# Altium PCB GridEye_STM32.PcbDoc
Units mm, origin at the board's own origin, x right, y up, seen from the top; angles counter-clockwise.
Board outline 95 x 62 mm, 2 copper layers (Top Layer, Bottom Layer); 64 components, 75 nets, 362 pads, 112 vias.
Unrouted connection lines stored in the file: 29.
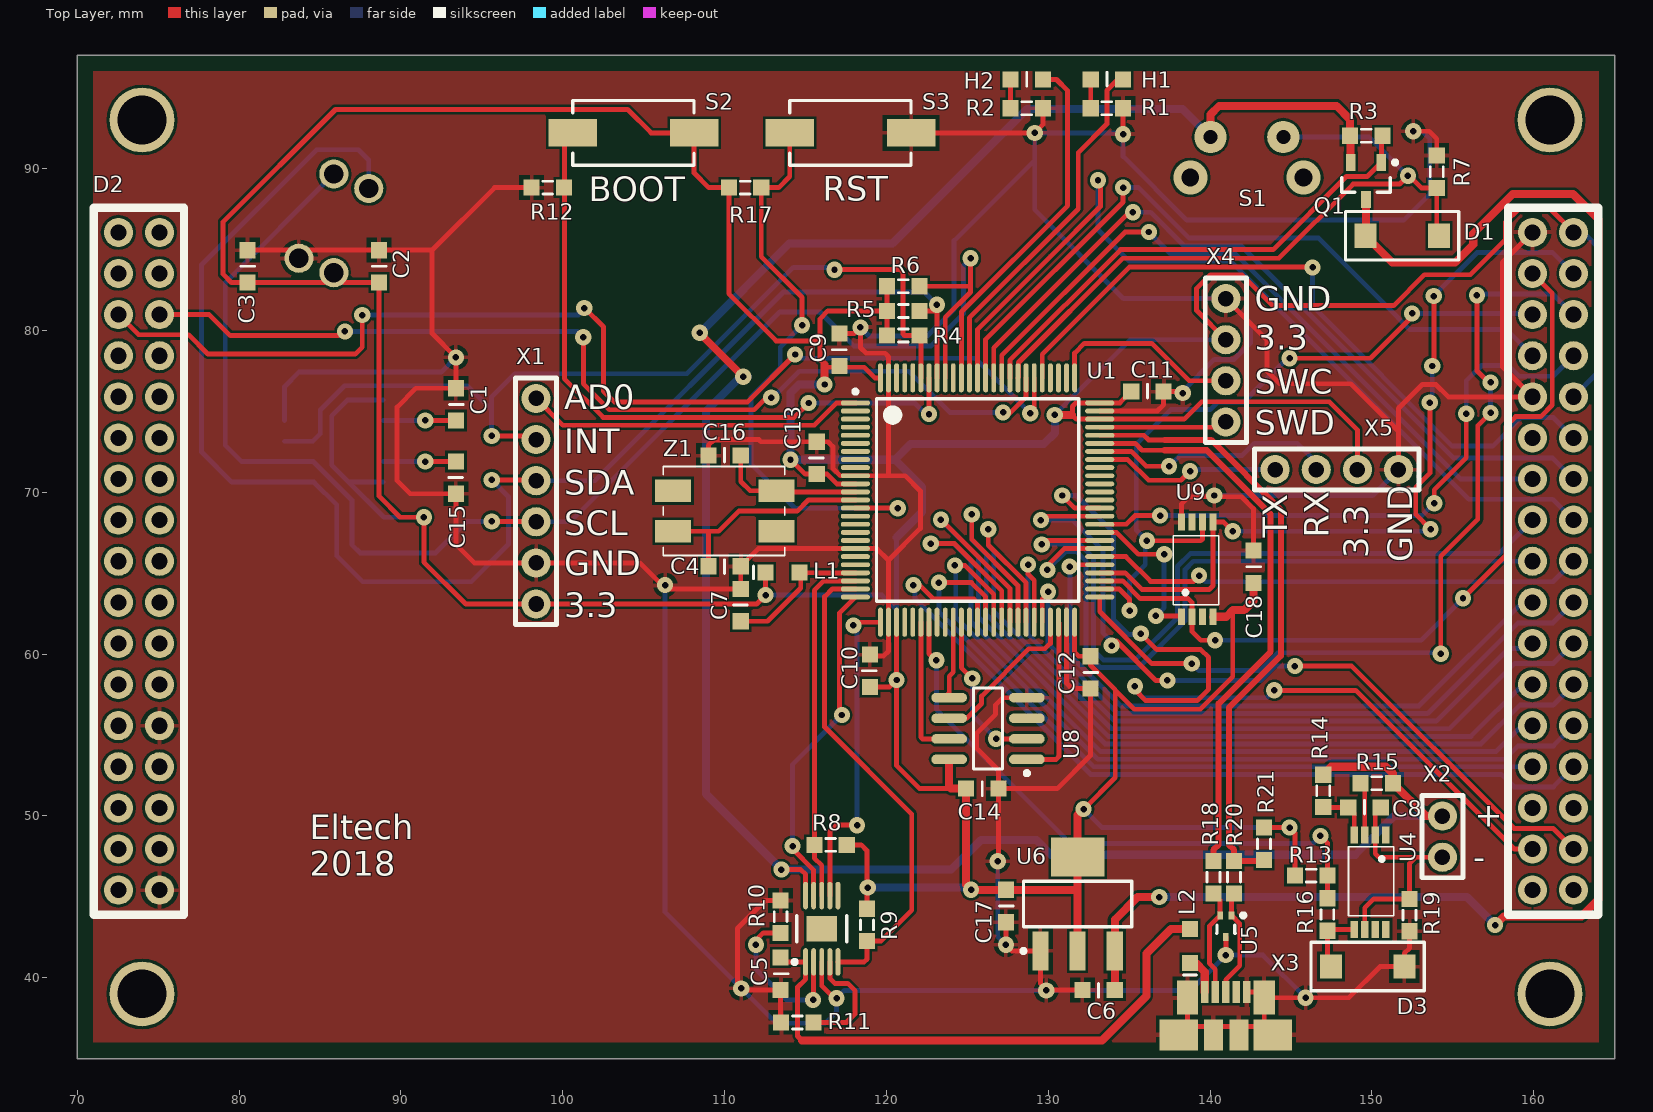
[diagram p0: Top Layer view]
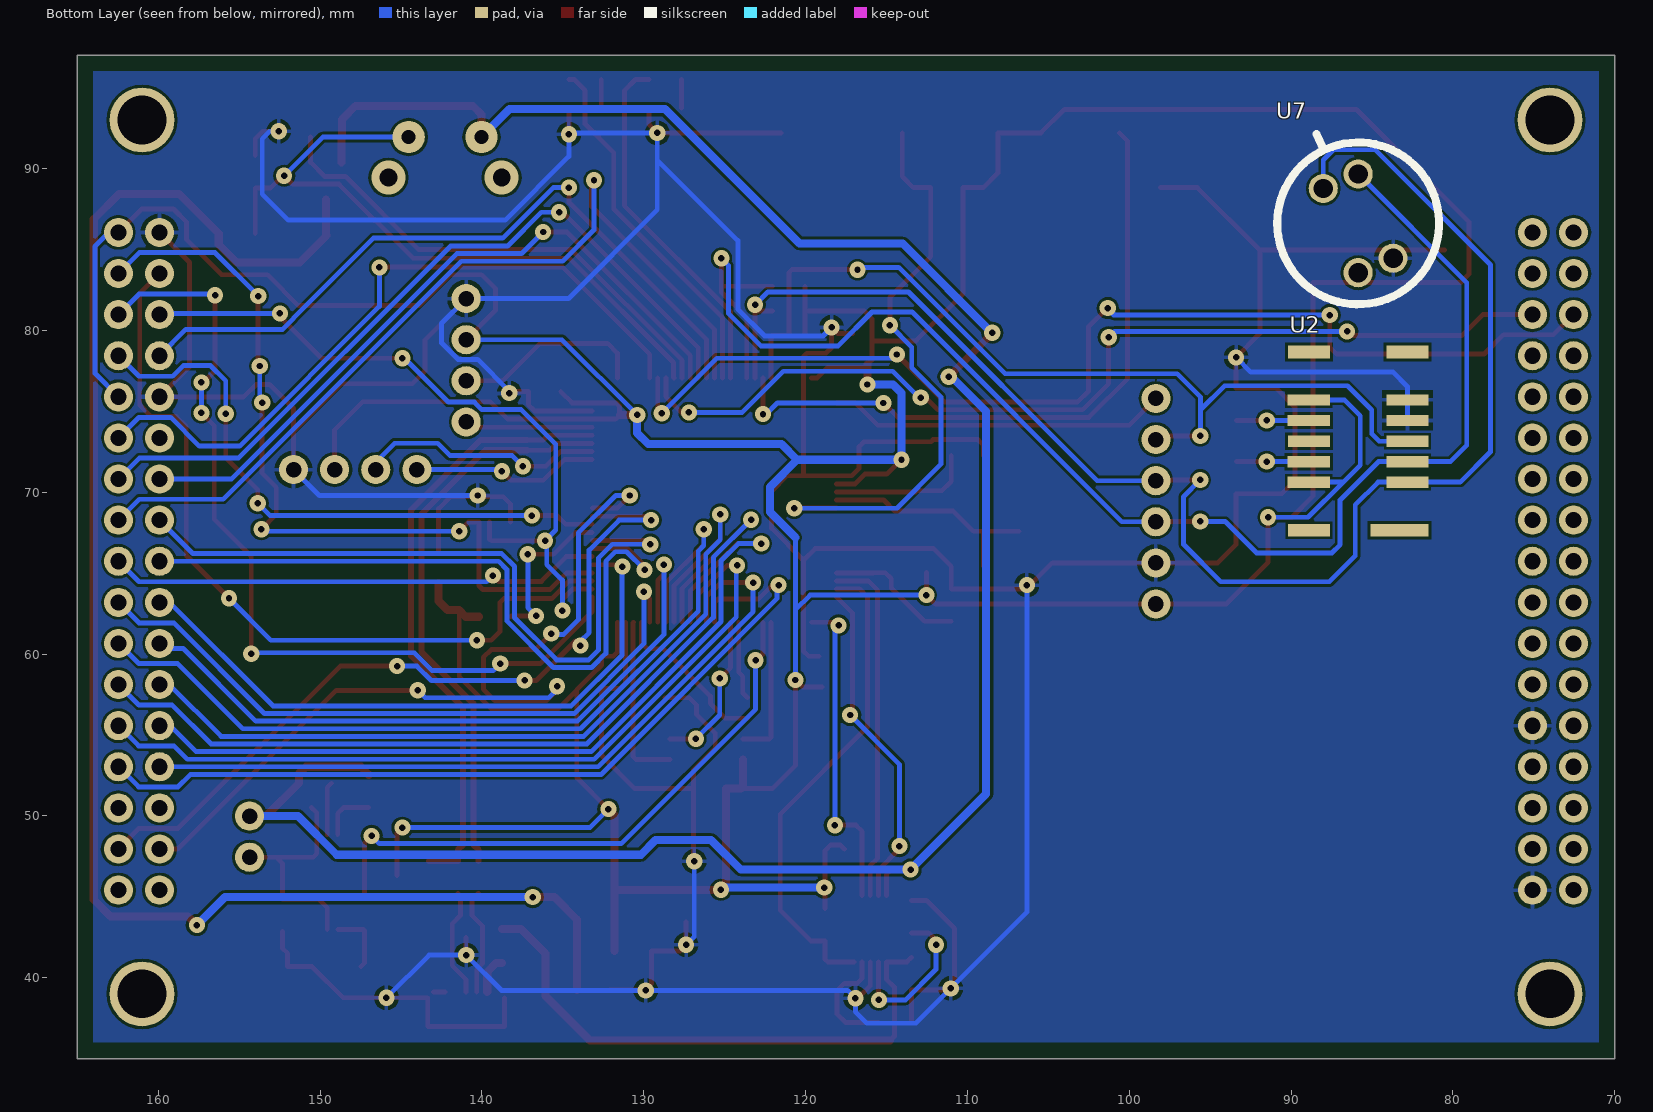
[diagram p1: Bottom Layer view, seen from below]
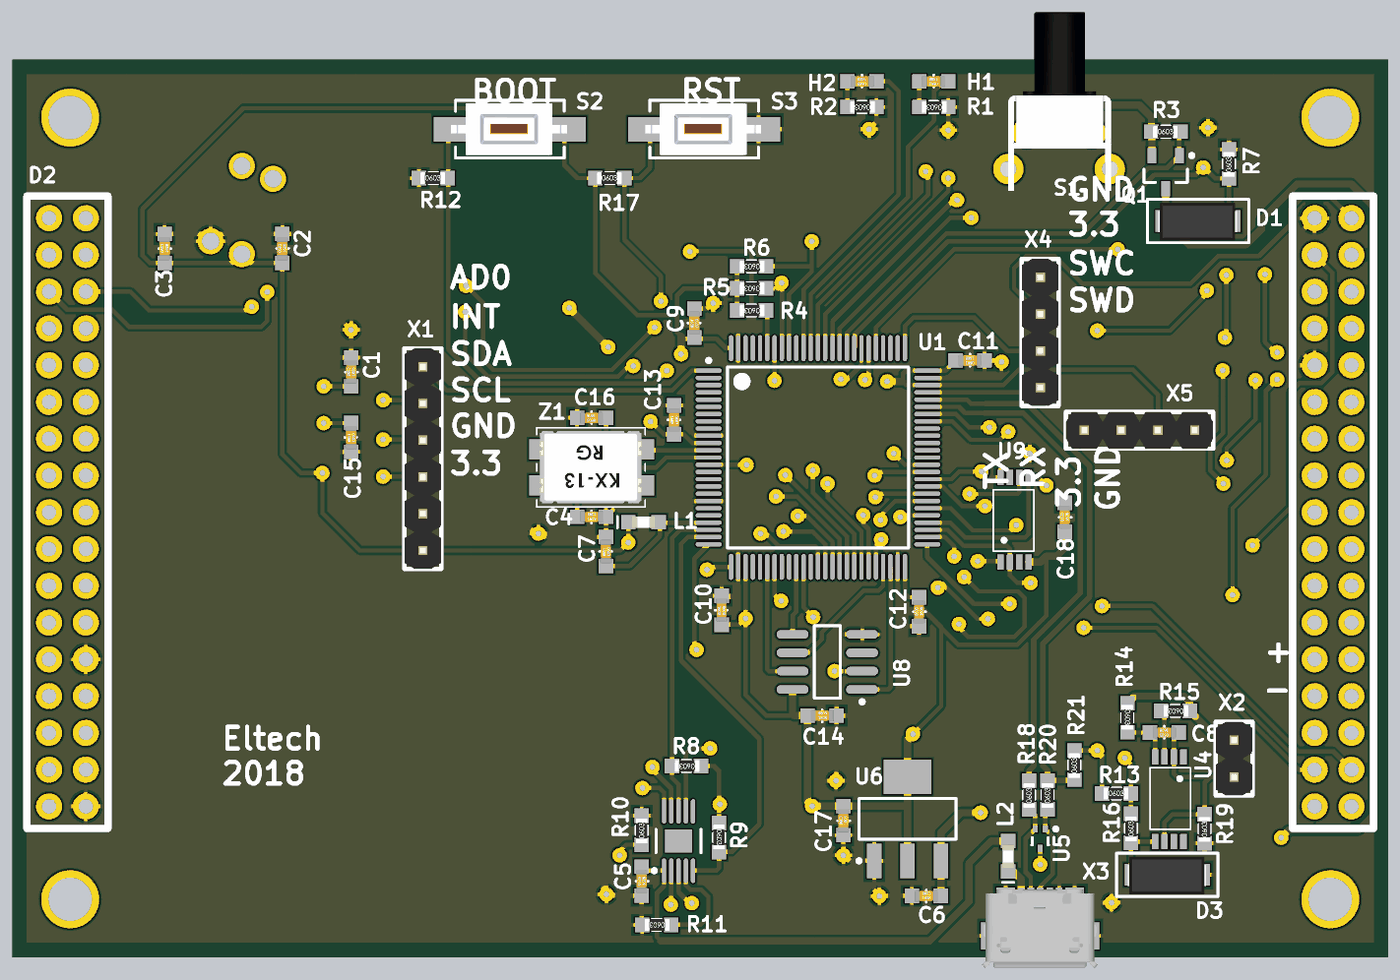
[diagram p2: 3D render of the assembled board from above, using the file's embedded part models]

## Layer stack, top to bottom
Top Solder: solder mask 0.0102, Solder Resist, Dk 3.5
Top Layer: signal copper 0.0356
Dielectric 1: dielectric 0.32, FR-4, Dk 4.8
Bottom Layer: signal copper 0.0356
Bottom Solder: solder mask 0.0102, Solder Resist, Dk 3.5

## Board outline
70,35 70,97 165,97 165,35

## Design rules (kind name [scope] priority, off if disabled: settings)
Clearance Clearance_1 [All] p1: gap=0.17
Clearance Poly [All vs InPoly] p2: gap=0.4
ComponentClearance [All] p1 off: gap=0.254 collisioncheckmode=3 verticalgap=0.254 showdistances=FALSE
DiffPairsRouting [All] p1: maxlimit=0.254 minlimit=0.254 mostfreqgap=0.254 toplayer_minwidth=0.3 toplayer_maxwidth=0.381 toplayer_prefwidth=0.381 bottomlayer_minwidth=0.3 bottomlayer_maxwidth=0.381 bottomlayer_prefwidth=0.381 maxuncoupledlength=12.7
HoleSize [IsVia] p1: absolutevalues=TRUE maxlimit=2.54 minlimit=0.4 maxpercent=80.000 minpercent=20.000
PolygonConnect [All] p1: connectstyle=Relief reliefconductorwidth=0.254 reliefentries=4 polygonreliefangle="90 Angle" airgapwidth=0.254
RoutingVias [All] p1: holewidth=0.711 width=1.27 viastyle="Through Hole" minholewidth=0.711 minwidth=1.27 maxholewidth=0.711 maxwidth=1.27
SolderMaskExpansion [All] p1: expansion=0.102
Width [All] p1: maxlimit=1 minlimit=0.3 preferedwidth=0.3
27 further rules are at their usual default settings.

## Classes and differential pairs
differential pair USB: +USB_P -USB_N

## Components (designator, comment, footprint, x,y, rotation, side; value= is the part's Value field where it differs from the comment)
C1 "1uF" C0603 93.396,74.524 r90 top
C2 "100uF" C0603 88.646,83.058 r90 top
C3 "1uF" C0603 80.518,83.058 r90 top
C4 "22pF" C0603 109.098,65.43 r0 top
C5 "1uF" C0603 113.462,39.35 r90 top
C6 "100uF" C0603 132.207,39.243 r0 top
C7 "100nF" C0603 110.998,63.927 r270 top
C8 "100nF" C0603 150.439,50.521 r180 top
C9 "100nF" C0603 117.094,79.705 r270 top
C10 "100nF" C0603 118.974,59.869 r270 top
C11 "100nF" C0603 137.028,76.22 r180 top
C12 "100nF" C0603 132.608,57.968 r90 top
C13 "100nF" C0603 115.697,73.02 r270 top
C14 "100nF" C0603 125.017,51.689 r0 top
C15 "1.5uF" C0603 93.396,71.807 r270 top
C16 "22pF" C0603 110.898,72.263 r180 top
C17 "100uF" C0603 127.381,43.534 r90 top
C18 "100nF" C0603 142.672,64.491 r90 top
D1 "5.6 Shottky" SMA_Diode 151.867,85.852 r180 top
D2 "Display 3.2inch" Display_3.2inch 162.458,45.415 r180 top
D3 "5.6 Shottky" SMA_Diode 149.737,40.691 r180 top
H1 "LED_SMD" C0603 134.52,95.504 r180 top
H2 "LED_SMD" C0603 129.567,95.504 r180 top
L1 "BLM21PG220" L0603 112.679,65.049 r0 top
L2 "BLM21PG220" L0603 138.76,41.069 r90 top
Q1 "IRLML9303" INF-PG-SOT23_N 149.631,89.23 r270 top
R1 "150" R0603 134.52,93.726 r180 top
R2 "150" R0603 129.567,93.726 r180 top
R3 "10K" R0603 148.747,92.024 r0 top
R4 "10K" R0603 121.94,79.68 r180 top
R5 "10K" R0603 121.94,81.204 r180 top
R6 "10K" R0603 121.94,82.728 r180 top
R7 "1K" R0603 154,88.905 r90 top
R8 "10K" R0603 117.45,48.209 r180 top
R9 "10K" R0603 118.796,44.166 r270 top
R10 "?" R0603 113.462,42.874 r90 top
R11 "?" R0603 115.392,37.236 r180 top
R12 "10K" R0603 98.171,88.824 r0 top
R13 "10k" R0603 145.344,46.309 r0 top
R14 "500" R0603 146.99,52.446 r270 top
R15 "1k" R0603 151.201,52.019 r180 top
R16 "150" R0603 147.244,43.007 r90 top
R17 "10K" R0603 110.363,88.824 r0 top
R18 "28" R0603 140.208,45.312 r90 top
R19 "?" R0603 152.324,42.975 r90 top
R20 "28" R0603 141.478,45.312 r90 top
R21 "1.5k" R0603 143.332,47.376 r90 top
S1 "Tact_switch" Tact_switch_DIP_angle_ 144.526,91.948 r180 top
S2 "1437566-3" Tact_switch_smd 108.109,92.202 r180 top
S3 "1437566-3" Tact_switch_smd 121.521,92.202 r180 top
U1 "STM32L475VG" LQFP100_N 125.628,69.52 r0 top
U2 "GridEye" "Panasonic GridEye" 88.6,67.652 r90 bottom
U4 "DS2780 Fuel Gauge" TSSOP-8 150.854,48.833 r180 top
U5 "TPD2USB30" SOT_TPD2USB30 140.97,43.18 r270 top
U6 "LD1117AS12TR" SOT-223_N 131.812,44.556 r90 top
U7 "MLX90640 IR Array" MLX90640 85.852,86.614 r90 bottom
U8 "23K256-I/SN" SOIC-SN8_N 126.276,55.397 r180 top
U9 "M95320 flash" TSSOP-8 138.227,62.306 r0 top
X1 "Pins 6x2.54" "Pins 6x2.54" 98.349,75.794 r270 top
X2 "Pins 2x2.54" "Pins 2x2.54" 154.356,47.447 r90 top
X3 "microUSB" microUSB 142.295,39.116 r90 top
X4 "Pins 4x2.54" "Pins 4x2.54" 140.97,74.346 r90 top
X5 "Pins 4x2.54" "Pins 4x2.54" 144.018,71.399 r0 top
Z1 "KX-13" "kx 13 12MHz" 113.207,67.589 r180 top

## Footprints (in the part's own frame and the unit in brackets; to place one, negate y for a bottom-side part, rotate by r counter-clockwise, add the part's x,y. Pads: shape width x height; smd on the part's side, far side on the other; paste and mask are expansions set on the pad)
C0603 [mm]
  rect 1x1 smd: 1(-0.1,0) 2(1.9,0)
  silkscreen extent 0.9,-0.45 0.9,0.4, body extent 0.1,-0.4 1.7,0.4, height 0.8
Display_3.2inch [mm]
  round 1.8 hole 1: 1(0,0) 1(89.916,-40.64) 2(2.54,0) 2(87.376,-40.64) 3(0,-2.54) 3(89.916,-38.1) 4(2.54,-2.54) 4(87.376,-38.1) 5(0,-5.08) 5(89.916,-35.56) 6(2.54,-5.08) 6(87.376,-35.56) 7(0,-7.62) 7(89.916,-33.02) 8(2.54,-7.62) 8(87.376,-33.02) 9(0,-10.16) 9(89.916,-30.48) 10(2.54,-10.16) 10(87.376,-30.48) 11(0,-12.7) 11(89.916,-27.94) 12(2.54,-12.7) 12(87.376,-27.94) 13(0,-15.24) 13(89.916,-25.4) 14(2.54,-15.24) 14(87.376,-25.4) 15(0,-17.78) 15(89.916,-22.86) 16(2.54,-17.78) 16(87.376,-22.86) 17(0,-20.32) 17(89.916,-20.32) 18(2.54,-20.32) 18(87.376,-20.32) 19(0,-22.86) 19(89.916,-17.78) 20(2.54,-22.86) 20(87.376,-17.78) 21(0,-25.4) 21(89.916,-15.24) 22(2.54,-25.4) 22(87.376,-15.24) 23(0,-27.94) 23(89.916,-12.7) 24(2.54,-27.94) 24(87.376,-12.7) 25(0,-30.48) 25(89.916,-10.16) 26(2.54,-30.48) 26(87.376,-10.16) 27(0,-33.02) 27(89.916,-7.62) 28(2.54,-33.02) 28(87.376,-7.62) 29(0,-35.56) 29(89.916,-5.08) 30(2.54,-35.56) 30(87.376,-5.08) 31(0,-38.1) 31(89.916,-2.54) 32(2.54,-38.1) 32(87.376,-2.54) 33(0,-40.64) 33(89.916,0) 34(2.54,-40.64) 34(87.376,0)
  silkscreen extent -1.52,-42.16 91.44,1.52
INF-PG-SOT23_N [mm] "SOT23, 3-Leads, Body 2.9x1.3mm, Pitch 0.95mm, IPC Medium Density"
  rect 1.05x0.6 smd: 1(-1.15,0.95) 2(-1.15,-0.95) 3(1.15,0)
  silkscreen extent -1.27,-1.5 0.7,1.93, body extent -0.7,-1.5 0.7,1.5, height 1.1
"kx 13 12MHz" [mm]
  rect 2.2x1.4 smd: 1(0,-2.5) 2(6.4,-2.5) 3(6.4,0) 4(0,0)
  silkscreen extent -0.5,-4 7,1.5, body extent -0.22,-3.77 6.78,1.23, height 1.3
L0603 [mm]
  rect 1x1 smd: 1(-0.149,0) 2(1.951,0)
  silkscreen extent -0.9,-0.4 -0.9,0.4, body extent 0.09,-0.4 1.69,0.4, height 0.8
LQFP100_N [mm] "Thin QFP, 100-Leads, Body 14x14mm, Pitch 0.5mm, IPC Medium Density"
  oval 1.8x0.3 smd: 1(-7.55,6) 2(-7.55,5.5) 3(-7.55,5) 4(-7.55,4.5) 5(-7.55,4) 6(-7.55,3.5) 7(-7.55,3) 8(-7.55,2.5) 9(-7.55,2) 10(-7.55,1.5) 11(-7.55,1) 12(-7.55,0.5) 13(-7.55,0) 14(-7.55,-0.5) 15(-7.55,-1) 16(-7.55,-1.5) 17(-7.55,-2) 18(-7.55,-2.5) 19(-7.55,-3) 20(-7.55,-3.5) 21(-7.55,-4) 22(-7.55,-4.5) 23(-7.55,-5) 24(-7.55,-5.5) 25(-7.55,-6) 51(7.55,-6) 52(7.55,-5.5) 53(7.55,-5) 54(7.55,-4.5) 55(7.55,-4) 56(7.55,-3.5) 57(7.55,-3) 58(7.55,-2.5) 59(7.55,-2) 60(7.55,-1.5) 61(7.55,-1) 62(7.55,-0.5) 63(7.55,0) 64(7.55,0.5) 65(7.55,1) 66(7.55,1.5) 67(7.55,2) 68(7.55,2.5) 69(7.55,3) 70(7.55,3.5) 71(7.55,4) 72(7.55,4.5) 73(7.55,5) 74(7.55,5.5) 75(7.55,6)
  oval 0.3x1.8 smd: 26(-6,-7.55) 27(-5.5,-7.55) 28(-5,-7.55) 29(-4.5,-7.55) 30(-4,-7.55) 31(-3.5,-7.55) 32(-3,-7.55) 33(-2.5,-7.55) 34(-2,-7.55) 35(-1.5,-7.55) 36(-1,-7.55) 37(-0.5,-7.55) 38(0,-7.55) 39(0.5,-7.55) 40(1,-7.55) 41(1.5,-7.55) 42(2,-7.55) 43(2.5,-7.55) 44(3,-7.55) 45(3.5,-7.55) 46(4,-7.55) 47(4.5,-7.55) 48(5,-7.55) 49(5.5,-7.55) 50(6,-7.55) 76(6,7.55) 77(5.5,7.55) 78(5,7.55) 79(4.5,7.55) 80(4,7.55) 81(3.5,7.55) 82(3,7.55) 83(2.5,7.55) 84(2,7.55) 85(1.5,7.55) 86(1,7.55) 87(0.5,7.55) 88(0,7.55) 89(-0.5,7.55) 90(-1,7.55) 91(-1.5,7.55) 92(-2,7.55) 93(-2.5,7.55) 94(-3,7.55) 95(-3.5,7.55) 96(-4,7.55) 97(-4.5,7.55) 98(-5,7.55) 99(-5.5,7.55) 100(-6,7.55)
  silkscreen extent -7.67,-6.25 6.25,6.82, body extent -7,-7 7,7, height 1.6
microUSB [mm]
  rect 1.38x0.45 smd: 1(0,2.625) 2(0,1.975) 3(0,1.325) 4(0,0.675) 5(0,0.025)
  rect 1.9x2.37 smd: 5(-2.65,4.225) 5(-2.65,-1.575)
  rect 1.9x1.175 smd: 5(-2.65,0.525) 5(-2.65,2.1)
  rect 2.1x1.3 smd: 5(-0.35,3.7) 5(-0.35,-1.05)
  body extent -4.85,-2.64 0.58,5.34, height 2.87
MLX90640 [mm]
  round 1.8 hole 1.2: 1(-3.048,0) 2(-2.155,-2.155) 3(3.048,0) 4(2.155,2.155)
  silkscreen extent -5,-5 5.52,5
"Panasonic GridEye" [mm]
  rect 0.8x3.6 smd: 1(0,-5.3)
  rect 0.7x2.6 smd: 2(2.972,-5.795) 3(4.242,-5.795) 4(5.5,-5.8) 5(6.782,-5.795) 6(8.052,-5.795) 9(8.052,0.305) 10(6.782,0.305) 11(5.5,0.3) 12(4.242,0.305) 13(2.972,0.305)
  rect 0.8x2.6 smd: 7(11,-5.8) 8(11,0.3) 14(0,0.3)
  body extent -0.26,-6.81 11.34,1.19, height 4.34
"Pins 2x2.54" [mm]
  round 1.8 hole 0.96: 1(0,0) 2(2.54,0)
  silkscreen extent -1.27,-1.27 3.81,1.27, body extent -1.27,-1.27 3.81,1.27, height 8.81
"Pins 4x2.54" [mm]
  round 1.8 hole 0.96: 1(0,0) 2(2.54,0) 3(5.08,0) 4(7.62,0)
  silkscreen extent -1.27,-1.27 8.89,1.27, body extent -1.27,-1.27 8.89,1.27, height 8.81
"Pins 6x2.54" [mm]
  round 1.8 hole 0.96: 1(0,0) 2(2.54,0) 3(5.08,0) 4(7.62,0) 5(10.16,0) 6(12.7,0)
  silkscreen extent -1.27,-1.27 13.97,1.27, body extent -1.27,-1.27 13.97,1.27, height 8.81
R0603 [mm]
  rect 1x1 smd: 1(-0.1,0) 2(1.9,0)
  silkscreen extent 0.6,-0.4 1.2,0.4, body extent 0.01,-0.4 1.71,0.4, height 0.56
SMA_Diode [mm]
  rect 1.35x1.5 smd: 1(-2.265,0) 2(2.265,0)
  silkscreen extent -3.5,-1.5 3.5,1.5, body extent -2.68,-1.25 2.73,1.35, height 2.31
SOIC-SN8_N [mm] "SOIC, 8-Leads, Body 4.9x3.8mm, Pitch 1.27mm, IPC Medium Density"
  oval 2.2x0.6 smd: 1(-2.4,1.905) 2(-2.4,0.635) 3(-2.4,-0.635) 4(-2.4,-1.905) 5(2.4,-1.905) 6(2.4,-0.635) 7(2.4,0.635) 8(2.4,1.905)
  silkscreen extent -2.53,-2.5 0.9,2.88, body extent -2,-2.5 2,2.5, height 1.75
SOT-223_N [mm] "SOT223, 4-Leads, Body 6.5x3.5mm, Pitch 2.3mm, Lead Span 7mm, IPC Medium Density"
  rect 2.4x1 smd: 1(-2.9,2.3) 2(-2.9,0) 3(-2.9,-2.3)
  rect 2.4x3.3 smd: 4(2.9,0)
  silkscreen extent -3.02,-3.35 1.4,3.47, body extent -1.85,-3.35 1.85,3.35, height 1.8
SOT_TPD2USB30 [mm] "SOT23, 3-Leads, Body 1,00x1,00mm, Pitch 0,35mm, IPC Medium Density"
  rect 0.5x0.35 smd: 1(-0.675,0.35) 2(-0.675,-0.35) 3(0.675,0)
  silkscreen extent -0.8,-0.58 0.43,1.2, body extent -0.43,-0.53 0.43,0.53, height 0.5
Tact_switch_DIP_angle_ [mm]
  round 2 hole 0.85: 1(0,0) 2(4.5,0)
  body extent -1.99,-8.33 6.41,4.03, height 7
Tact_switch_smd [mm]
  rect 3x1.7 smd: 1(0,0) 2(7.5,0)
  silkscreen extent 0,-2 7.5,2, body extent -0.19,-1.8 7.81,1.8, height 2.51
TSSOP-8 [mm]
  rect 0.45x1.05 smd: 1(0,0) 2(0.65,0) 3(1.3,0) 4(1.95,0) 5(1.95,5.85) 6(1.3,5.85) 7(0.65,5.85) 8(0,5.85)
  silkscreen extent -0.5,0.75 2.3,5

## Part data
C1 C2 C3 C4 C5 C6 C7 C8 C9 C10 C11 C12 C13 C14 C15 C16 C17 C18: library part Condensator
D1 D3: library part Diod
D2: library part Display_3.2inch
L1 L2: library part Inductance
Q1: library part "BSS215P H6327", "P-Channel OptiMOS P2 Small-Signal-Transistor, -20 V VDS, -1.5 A ID, -55 to 150 degC, PG-SOT23, Reel, Green"
R1 R2 R3 R4 R5 R6 R7 R8 R9 R10 R11 R12 R13 R14 R15 R16 R17 R18 R19 R20 R21: library part Resistor
S2 S3: library part Tact_switch
U1: "STM32 ARM-based 32-bit MCU with 1 Mbyte Flash, 100-pin LQFP"
U2: library part "Panasonic GridEye"
U4: library part DS2780+
U5: "Usb protector"
U6: "1A, Low Drop Positive Voltage Regulator, 1.2V, 4-Pin SOT-223, Tape and Reel"
U7: library part MLX90640
U8: "256K, 32768x8-bit, 3.6V SPI Serial SRAM, 8-Pin SOIC 3.9mm, Industrial Temperature"
U9: library part M95320
Z1: library part "KX 13 Geyer"

## Free pads (board coordinates)
  round 4 hole 3: 0(74,93) 1(161,93) 2(74,39) 3(161,39)
  oval 0.3x1.7 smd: 1(115.002,40.978) 2(115.502,40.978) 3(116.002,40.978) 4(116.502,40.978) 5(117.002,40.978) 6(117.002,45.078) 7(116.502,45.078) 8(116.002,45.078) 9(115.502,45.078) 10(115.002,45.078)
  rect 1.88x1.57 smd: 11(116.002,43.028)

## Via types
v1: diameter 1, hole 0.4, Top Layer to Bottom Layer, 110 vias
v2: diameter 2.1, hole 1.1, Top Layer to Bottom Layer, 2 vias

## Nets (pads, with @x,y where several pads share a name; then routed paths per layer and width w, separated by ;. In a path a pad name is that pad's centre, name@x,y a point inside that pad or via, vN(x,y) a via of type N, cw(c..) or ccw(c..) an arc to the next point about the centre after c; other vN are vias at no path point)
+3.3V: C2.1 C3.1 C9.2 C10.2 C11.2 C12.2 C13.2 C14.1 C17.2 C18.1 D2.25 D2.33 L1.1 R4.2 R5.2 R6.2 R8.1 R9.1 R13.1 R17.1 R21.2 S2.1 U1.11 U1.28 U1.50 U1.73 U1.75 U1.100 U2.9 U2.13 U6.2 U6.4 U7.1 U8.8 U9.4 X1.6 X4.3 X5.3 | length 373.5
  Top Layer w0.3: L1.1 v1(112.53,63.644) 111.98,63.094 X1.6 94.005,63.094 91.415,65.684 v1(91.415,68.453) 89.941,68.453 88.646,69.748 C2.1 86.46,82.958 U7.1 85.244,82.958 C3.1 79.526,82.958 78.994,83.49 78.994,86.69 85.954,93.65 104.013,93.65 105.461,92.202 S2.1 108.109,89.731 109.017,88.824 R17.1 110.263,82.269 113.182,79.35 115.9,79.35 ; v1(114.071,72.009) 114.097,72.009 114.986,71.12 C13.2 116.332,71.12 116.932,70.52 U1.11 ; R8.1@117.595,47.955 117.849,48.209 118.44,48.209 118.796,47.854 R9.1 ; C10.2 120.199,57.969 v1(120.628,58.398) ; U1.100 119.272,77.07 118.618,77.724 116.357,77.724 116.18,77.902 115.9,78.181 115.9,79.35 ; R4.2 R5.2 ; R6.2 R5.2 ; U1.28 v1(120.628,58.398) ; 123.977,51.689 122.047,51.689 120.628,53.108 v1(120.628,58.398) ; U1.50 131.628,60.116 131.877,59.868 C12.2 132.608,59.314 133.235,58.688 133.241,58.688 134.137,57.791 134.137,57.768 ; v1(132.182,50.419) 134.137,52.375 134.137,57.768 ; C11.2 134.427,75.52 U1.75 131.705,75.52 131.496,75.311 131.496,74.752 131.728,74.52 U1.73 138.401,74.52 139.471,75.59 147.371,75.59 149.098,73.863 X5.3 ; X4.3 139.167,81.229 139.167,82.601 140.005,83.439 141.961,83.439 143.866,81.534 151.333,81.534 153.238,83.439 156.083,83.439 158.242,85.598 158.242,86.69 159.055,87.503 161.011,87.503 D2.33@162.458,86.055 ; 141.402,62.713 141.402,58.598 139.395,56.591 135.315,56.591 134.137,57.768 ; R21.2 v1(144.907,49.276) 145.244,48.939 R13.1 ; 115.9,79.35 115.9,80.721 116.383,81.204 R5.2
  Top Layer w0.5: v1(116.18,76.657) 116.18,77.902 ; U8.8 123.876,51.791 123.977,51.689 C14.1 124.917,45.745 v1(125.229,45.434) C17.2 131.615,45.434 ; v1(130.404,74.778) 131.47,74.778 ; U6.2 U6.4 131.812,50.049 v1(132.182,50.419) ; U9.4 140.995,62.306 141.402,62.713 142.113,62.713 142.672,63.271 C18.1@142.672,64.364
  Bottom Layer w0.3: U2.13 86.78,70.624 ; U2.9 86.702,75.704 85.725,74.727 85.725,71.679 86.78,70.624 ; v1(91.415,68.453) 88.951,68.453 86.78,70.624 ; v1(112.53,63.644) 119.718,63.644 120.628,62.734 ; v1(120.628,58.398) 120.628,62.734 ; 120.628,67.212 120.628,62.734 ; v1(130.404,74.778) 135.052,79.426 X4.3 ; v1(132.182,50.419) 133.325,49.276 v1(144.907,49.276) ; D2.25@162.458,75.895 163.906,77.343 163.906,85.192 163.043,86.055 D2.33@162.458,86.055
  Bottom Layer w0.5: v1(116.18,76.657) 114.605,76.657 114.071,76.124 v1(114.071,72.009) 120.523,72.009 ; v1(118.847,45.568) v1@125.095,45.568 ; 120.628,67.212 122.199,68.783 122.199,70.333 120.523,72.009 ; v1(130.404,74.778) 130.404,73.66 129.718,72.974 121.488,72.974 120.523,72.009
+5VUSB: C5.2 L2.2 pad.1@115.002,40.978 | length 35.2
  Top Layer w0.3: C5.2 113.734,40.978 115.002,40.978 115.002,39.919 114.503,39.421 114.503,36.398 114.783,36.119
  Top Layer w0.5: 114.783,36.119 133.325,36.119 136.068,38.862 136.068,41.504 137.584,43.019 L2.2
AD0: U1.1 X1.1 | length 21
  Top Layer w0.3: X1.1 100,74.143 115.545,74.143 116.922,75.52 U1.1
BAT+: pad.10 Q1.2 R3.1 R14.1 R15.1 S1.2 X2.2 | length 145
  Top Layer w0.3: v1(113.513,46.685) 114.706,46.685 115.002,46.39 pad.10
  Top Layer w0.5: v1(108.458,79.858) 108.433,79.858 v1(111.15,77.14) ; S1.2@140.564,91.41 S1.2 140.026,93.341 140.564,93.878 147.803,93.878 148.647,93.034 R3.1 ; R14.1 147.479,53.035 150.876,53.035 151.301,52.61 R15.1 153.333,49.987 X2.2 X2.2@154.762,49.987 ; Q1.2 R3.1@148.681,91.99
  Bottom Layer w0.5: v1@108.471,79.845 113.995,85.369 120.371,85.369 128.676,93.675 138.299,93.675 S1.2 ; v1@111.43,77.14 v1(111.15,77.14) 110.973,77.14 108.839,75.006 108.839,51.359 v1(113.513,46.685) 124.003,46.685 125.832,48.514 129.261,48.514 130.175,47.6 148.971,47.6 151.359,49.987 X2.2
BAT-: C8.1 R19.2 U4.2 U4.6 X2.1 | length 14.3
  Top Layer w0.3: U4.6 149.554,44.322 150.107,44.875 R19.2 152.324,47.066 152.705,47.447 ; C8.1 150.204,50.185 U4.2 150.204,47.662 150.419,47.447 152.705,47.447 ; X2.1 152.705,47.447
BL_CNTL: D2.27 U1.60 | length 37.4
  Top Layer w0.3: U1.60 134.822,68.02 135.357,68.555 v1(136.906,68.555) ; v1(153.848,69.317) 153.848,70.155 155.829,72.136 v1(155.829,74.854)
  Bottom Layer w0.3: v1(136.906,68.555) 153.086,68.555 v1(153.848,69.317) ; v1(155.829,74.854) 155.829,76.886 156.769,77.826 158.445,77.826 159.106,77.165 161.188,77.165 D2.27@162.458,78.435
BOOT: R12.2 S2.2 U1.94 | length 41.9
  Top Layer w0.3: S2.2 100.101,91.694 100.101,77.013 102.489,74.625 114.3,74.625 v1(115.189,75.514) ; v1@122.606,74.803 v1(122.628,74.826) U1.94
  Bottom Layer w0.3: v1(115.189,75.514) 121.742,75.514 122.53,74.727 v1(122.628,74.826)
CHG: pad.8 R8.2 U1.23 | length 21.9
  Top Layer w0.3: R8.2@115.545,48.26 115.545,47.396 116.002,46.939 pad.8 ; R8.2 115.55,63.937 116.133,64.52 U1.23
CS: D2.19 U1.88 | length 55.4
  Top Layer w0.3: U1.88 125.628,80.061 130.124,84.557 ; 130.124,84.582 130.124,84.557 ; v1(133.071,89.281) 133.223,89.281 133.223,87.655 130.124,84.557
  Bottom Layer w0.3: v1(133.071,89.281) 133.071,86.208 135.001,84.277 141.275,84.277 155.981,69.571 161.163,69.571 D2.19@162.458,68.275
D0: D2.3 U1.61 | length 48.9
  Top Layer w0.3: v1(129.54,68.275) 129.785,68.52 U1.61 ; v1(133.909,60.528) 133.934,60.528 134.214,60.808 136.652,58.369 v1(137.363,58.369) ; v1(145.237,59.258) 148.742,59.258 158.775,49.225 161.188,49.225 D2.3@162.458,47.955
  Bottom Layer w0.3: v1(129.54,68.275) 131.521,68.275 133.375,66.421 133.375,61.316 v1@133.883,60.808 ; v1(137.363,58.369) 143.129,58.369 144.018,59.258 v1(145.237,59.258)
D1: D2.4 U1.62 | length 55.5
  Top Layer w0.3: v1(130.861,69.799) 131.64,69.02 U1.62 ; v1(135.357,58.014) 135.357,57.785 136.017,57.125 139.192,57.125 139.903,57.836 139.903,59.792 139.421,60.274 136.703,60.274 v1(135.712,61.265) ; v1(143.967,57.76) 148.996,57.76 158.801,47.955 D2.4@159.918,47.955
  Bottom Layer w0.3: v1(130.861,69.799) 131.724,69.799 134.036,67.488 134.036,62.128 134.95,61.214 v1@135.712,61.214 ; v1(135.357,58.014) 135.357,57.81 135.865,57.302 143.51,57.302 v1(143.967,57.76)
D2: D2.5 U1.81 | length 69.5
  Top Layer w0.3: D2.5@72.542,80.975 73.787,79.731 76.886,79.731 78.08,78.537 87.173,78.537 87.605,78.969 v1(87.605,80.95) ; v1@101.346,81.382 102.514,80.213 102.514,76.251 103.2,75.565 111.405,75.565 v1(114.351,78.511) ; v1@128.905,74.854 129.128,75.077 U1.81
  Bottom Layer w0.3: v1(87.605,80.95) 100.965,80.95 100.965,81.026 v1(101.321,81.382) ; v1(114.351,78.511) 114.579,78.283 125.476,78.283 v1(128.88,74.879)
D3: D2.6 U1.82 | length 61.3
  Top Layer w0.3: D2.6@75.082,80.975 78.156,80.975 79.451,79.68 86.157,79.68 v1@86.538,80.061 ; v1@101.27,79.502 101.27,76.708 102.883,75.095 111.824,75.095 112.573,75.844 v1(112.878,75.844) ; v1@127.483,74.752 128.628,75.898 U1.82
  Bottom Layer w0.3: v1(86.538,79.934) 100.914,79.934 v1(101.27,79.578) ; v1(112.878,75.844) 112.986,75.844 114.619,77.477 121.368,77.477 123.916,74.93 v1(127.203,74.93)
D4: D2.7 U1.38 | length 52.6
  Top Layer w0.3: v1(121.666,64.262) 122.047,64.262 122.911,63.398 125.4,63.398 125.628,63.17 U1.38
  Bottom Layer w0.3: v1@121.755,64.351 121.755,63.436 132.639,52.553 158.013,52.553 158.775,51.791 161.214,51.791 D2.7@162.458,53.035
D5: D2.8 U1.39 | length 47.3
  Top Layer w0.3: v1(123.241,64.414) 125.247,64.414 126.128,63.533 U1.39
  Bottom Layer w0.3: v1(123.241,64.414) 123.241,62.615 132.821,53.035 D2.8@159.918,53.035
D6: D2.9 U1.40 | length 50.7
  Top Layer w0.3: v1(124.231,65.481) 124.845,65.481 126.628,63.698 U1.40
  Bottom Layer w0.3: v1@124.282,65.456 124.282,62.281 133.058,53.505 158.204,53.505 159.029,54.331 161.214,54.331 D2.9@162.458,55.575
D7: D2.10 U1.41 | length 52.9
  Top Layer w0.3: v1(122.733,66.827) 124.206,66.827 127.128,63.905 U1.41
  Bottom Layer w0.3: v1(122.733,66.827) 124.155,66.827 125.222,65.761 125.222,62.006 133.252,53.975 157.658,53.975 159.258,55.575 D2.10@159.918,55.575
D8: D2.11 U1.42 | length 56.6
  Top Layer w0.3: v1(123.368,68.301) 123.397,68.301 127.628,64.07 U1.42
  Bottom Layer w0.3: v1(123.368,68.301) 125.692,65.976 125.692,62.268 133.515,54.445 156.731,54.445 159.131,56.845 161.188,56.845 D2.11@162.458,58.115
D9: D2.12 U1.43 | length 52.5
  Top Layer w0.3: v1@125.273,68.555 125.273,67.09 128.128,64.234 U1.43
  Bottom Layer w0.3: v1(125.273,68.631) 125.273,67.06 126.162,66.171 126.162,62.463 133.709,54.915 156.109,54.915 159.309,58.115 D2.12@159.918,58.115
D10: D2.13 U1.44 | length 52.9
  Top Layer w0.3: v1(126.289,67.716) 126.289,66.739 128.628,64.399 U1.44
  Bottom Layer w0.3: v1(126.289,67.716) 126.289,66.709 126.632,66.366 126.632,62.657 133.904,55.385 154.775,55.385 158.801,59.411 161.188,59.411 162.433,60.655 D2.13@162.458,60.655
D11: D2.14 U1.45 | length 43.4
  Top Layer w0.3: v1(128.753,65.532) 128.753,64.94 129.128,64.564 U1.45
  Bottom Layer w0.3: v1(128.753,65.532) 128.753,61.201 134.099,55.855 153.971,55.855 158.466,60.35 159.614,60.35 D2.14@159.918,60.655
D12: D2.15 U1.46 | length 42.5
  Top Layer w0.3: U1.46 129.628,63.411 130.073,63.856 v1(129.984,63.856)
  Bottom Layer w0.3: v1(129.984,63.856) 129.984,60.634 134.294,56.325 153.429,56.325 159.029,61.925 161.188,61.925 D2.15@162.458,63.195
D13: D2.16 U1.55 | length 39.8
  Top Layer w0.3: v1@131.433,65.52 U1.55
  Bottom Layer w0.3: v1@131.343,65.507 131.343,59.94 134.488,56.795 152.909,56.795 159.309,63.195 D2.16@159.918,63.195
  other v1: 131.318,65.405
D14: D2.17 U1.56 | length 30.7
  Top Layer w0.3: U1.56 134.793,66.02 136.322,64.491 138.963,64.491 v1(139.319,64.846)
  Bottom Layer w0.3: v1(139.319,64.846) 139.7,64.465 161.188,64.465 D2.17@162.458,65.735
D15: D2.18 U1.57 | length 45.2
  Top Layer w0.3: v1@129.807,65.341 130.985,66.52 U1.57
  Bottom Layer w0.3: v1(129.946,65.202) 131.064,66.319 131.75,66.319 132.334,65.735 132.334,60.046 133.21,59.169 135.577,59.169 138.455,62.048 138.455,65.227 138.963,65.735 D2.18@159.918,65.735
DATA: R13.2 R16.2 U1.32 | length 37.1
  Top Layer w0.3: U1.32 122.628,60.023 v1@123.114,59.538 ; v1(146.812,48.768) 147.244,48.336 R13.2 R16.2
  Bottom Layer w0.3: v1(123.088,59.614) 123.088,56.591 131.394,48.285 146.329,48.285 v1(146.812,48.768)
FLASH_CS: U1.59 U9.1 | length 10.5
  Top Layer w0.3: U1.59 134.207,67.52 135.56,66.167 v1(137.16,66.167) ; v1(136.652,62.357) 138.176,62.357 U9.1
  Bottom Layer w0.3: v1(136.652,62.357) 137.16,62.865 v1@137.16,66.142 ; v1(137.16,66.167) v1@137.16,66.142 ; v1@137.389,65.913 v1@137.16,66.142
GND: C1.2 C2.2 C3.2 C4.2 C5.1 C6.1 C7.1 C9.1 C10.1 C11.1 C12.1 C13.1 C14.2 C15.2 C16.2 C17.1 C18.2 D2.26 D2.34 D3.1 pad.3@116.002,40.978 R1.1 R2.1 R7.2 R10.2 R11.2 R12.1 R19.1 S3.1 U1.10 U1.19 U1.27 U1.49 U1.74 U1.99 U2.5 U2.6 U5.3 U6.1 U7.2 U8.4 U9.8 X1.5 X3.5 X4.4 X5.4 | length 431.8
  Top Layer w0.3: C3.2 83.197,84.958 U7.2 84.196,84.958 C2.2 91.918,84.958 ; R12.1 95.783,88.824 91.918,84.958 ; C16.2 108.998,72.905 109.347,73.254 112.116,73.254 112.249,73.12 C13.1 116.389,73.12 116.688,72.822 116.688,71.476 117.143,71.02 U1.10 120.091,71.02 ; R11.2@113.462,37.236 C5.1 111.118,39.25 v1(111.023,39.345) 110.795,39.573 110.795,43.053 112.515,44.774 R10.2 ; pad.3@116.002,40.978 116.002,39.497 116.764,38.735 v1(116.916,38.735) 116.916,38.684 v1@117.069,38.532 ; C9.1 118.007,79.805 v1(118.389,80.188) 118.389,78.943 118.745,78.588 119.913,78.588 120.128,78.373 U1.99 120.128,71.057 120.091,71.02 ; C10.1@119.178,59.868 119.812,59.868 120.128,60.184 U1.27 120.128,65.8 ; S3.1 v1(129.159,92.202) 129.667,92.71 R2.1 ; v1(126.873,47.193) 126.917,47.237 C14.2 ; C17.1 v1(127.381,42.037) 127.762,41.656 U6.1 129.512,39.652 129.921,39.243 C6.1 ; U8.4 127.178,57.302 126.746,56.871 126.746,56.286 125.578,55.118 125.578,54.178 126.917,52.839 C14.2 ; U1.49 131.128,58.203 131.464,57.868 C12.1 132.608,53.741 130.556,51.689 C14.2 ; U1.74 136.742,75.02 137.128,75.406 C11.1 v1@138.206,76.22 ; v1(134.62,92.126) R1.1 ; U9.8 138.227,69.266 138.684,69.723 141.941,69.723 142.672,68.992 C18.2 C18.2@142.672,66.364 ; X3.5@138.595,38.766 138.595,36.991 143.345,36.991 143.345,38.766 148.57,38.766 150.495,40.691 D3.1 152.002,41.512 152.324,41.834 R19.1 ; v1(140.97,41.402) U5.3 ; X4.4 143.51,79.426 143.51,77.495 144.297,76.708 148.692,76.708 151.638,73.762 ; X3.5@142.27,39.116 X3.5@142.995,39.116 ; X5.4 151.638,73.762 ; v1(152.552,92.304) 153.543,92.304 154,91.846 R7.2 ; D2.34@159.918,86.055 158.064,84.201 158.064,77.749 159.918,75.895 154.711,75.895 153.949,76.657 153.111,76.657 151.638,75.184 151.638,73.762 ; 91.918,84.958 91.918,79.812 v1(93.396,78.334) C1.2 90.927,76.424 89.764,75.26 89.764,70.714 90.57,69.907 C15.2 93.396,66.777 94.539,65.634 X1.5 104.75,65.634 106.356,64.027 C7.1 C4.2 112.087,66.52 U1.19 119.408,66.52 120.128,65.8 ; 120.091,71.02 121.157,71.02 122.098,70.079 122.098,67.769 120.128,65.8
  Bottom Layer w0.3: U2.5 U2.6 82.805,76.531 83.693,77.419 92.481,77.419 v1(93.396,78.334) ; v1(106.324,64.262) 106.324,44.044 v1(111.023,39.345) 113.182,37.186 116.205,37.186 116.916,37.897 v1(116.916,38.735) 117.399,39.218 v1(129.87,39.218) 138.786,39.218 v1(140.97,41.402) 143.256,41.402 v1(145.898,38.76) ; v1(118.389,80.188) 118.923,79.654 122.53,79.654 124.181,81.305 124.181,85.547 129.159,90.526 ; v1(126.873,47.193) 126.873,42.545 v1(127.381,42.037) ; v1@134.544,92.202 v1(129.159,92.202) 129.159,90.526 ; v1(134.62,92.126) 134.62,90.754 138.557,86.817 151.968,86.817 153.568,88.417 153.568,91.846 153.111,92.304 v1(152.552,92.304) v1@152.4,92.304 ; v1(138.303,76.124) 138.303,76.251 140.258,78.206 141.475,78.206 142.494,79.224 142.494,80.442 X4.4 134.645,81.966 129.159,87.452 129.159,90.526 ; v1(140.259,69.799) 150.038,69.799 X5.4
INPUT_V: C6.2 D1.2 Q1.3 U6.3 | length 98.2
  Top Layer w0.5: C6.2@134.112,39.248 U6.3 134.112,43.586 135.509,44.983 v1(136.855,44.983) ; D1.2 151.253,84.201 155.143,84.201 156.261,85.319 156.261,85.979 158.699,88.417 162.433,88.417 163.982,86.868 163.982,44.831 162.941,43.79 158.14,43.79 v1(157.607,43.256) ; D1.2@149.631,85.882 Q1.3
  Bottom Layer w0.5: v1(136.855,44.983) 155.88,44.983 v1(157.607,43.256)
INT: R4.1 U1.95 U2.4 X1.2 | length 57.1
  Top Layer w0.3: v1(95.606,73.482) X1.2@98.12,73.482 ; v1(116.789,83.744) 116.815,83.769 120.828,83.769 121.031,83.566 121.031,79.763 121.114,79.68 R4.1 122.128,79.592 U1.95
  Bottom Layer w0.3: U2.4 84.557,73.152 85.014,73.609 85.014,75.082 86.512,76.581 94.107,76.581 95.606,75.082 ; v1@95.453,73.482 95.606,73.635 95.606,75.082 ; v1(116.789,83.744) 116.637,83.896 114.249,83.896 107.671,77.318 97.028,77.318 95.606,75.895 95.606,75.082
ISET2: pad.7 U1.26 | length 19.9
  Top Layer w0.3: pad.7 116.502,49.039 116.891,49.428 v1(118.186,49.428) ; v1@117.958,61.97 U1.26
  Bottom Layer w0.3: v1(117.958,61.773) 118.186,61.544 v1(118.186,49.428)
LCD_RST: D2.23 U1.80 | length 43.8
  Top Layer w0.3: U1.80 129.628,78.524 135.026,83.922 v1@146.329,83.922
  Bottom Layer w0.3: v1(146.329,83.896) 146.329,81.487 154.97,72.847 157.455,72.847 159.233,74.625 161.188,74.625 D2.23@162.458,73.355
LED1: H1.1 U1.89 | length 22.6
  Top Layer w0.3: U1.89 125.128,80.78 131.851,87.503 131.851,90.983 133.629,92.761 133.629,94.844 134.29,95.504 H1.1
LED2: H2.1 U1.90 | length 22.3
  Top Layer w0.3: U1.90 124.628,81.139 131.191,87.702 131.191,94.818 130.505,95.504 H2.1
NetC1_1: C1.1 U2.10 | length 4.5
  Top Layer w0.3: v1(91.504,74.434) C1.1@93.386,74.434
  Bottom Layer w0.3: U2.10 v1(91.504,74.434)
NetC4_1: C4.1 U1.13 Z1.3 | length 14.2
  Top Layer w0.3: Z1.3 109.626,67.589 110.871,68.834 114.478,68.834 115.164,69.52 U1.13 ; C4.1 108.998,67.532
NetC7_2: C7.2 L1.2 U1.22 | length 8.7
  Top Layer w0.3: C7.2 112.649,62.027 114.706,64.084 114.706,64.668 115.062,65.024 115.794,65.024 ; 115.798,65.02 U1.22
NetC8_2: C8.2 R14.2 U4.4 | length 3.4
  Top Layer w0.3: R14.2@147.015,50.521 C8.2 148.904,50.156 U4.4
NetC15_1: C15.1 U2.12 | length 4.5
  Top Layer w0.3: v1(91.503,71.894) C15.1@93.382,71.894
  Bottom Layer w0.3: U2.12 v1(91.503,71.894)
NetC16_1: C16.1 U1.12 Z1.1 | length 9
  Top Layer w0.3: C16.1 110.998,70.663 111.571,70.089 Z1.1 Z1.1@113.251,70.045 ; Z1.1@113.207,70.02 U1.12
NetD3_2: D3.2 R16.1 U4.5 | length 4
  Top Layer w0.3: D3.2 147.244,40.919 R16.1 147.32,42.983 U4.5
NetH1_2: H1.2 R1.2 | length 1.8
  Top Layer w0.3: R1.2 H1.2
NetH2_2: H2.2 R2.2 | length 1.8
  Top Layer w0.3: R2.2 H2.2
NetL2_1: L2.1 X3.1 | length 2.4
  Top Layer w0.5: L2.1 139.116,40.919 139.67,40.365 X3.1
NetR10_1: pad.2@115.502,40.978 R10.1 | length 10.6
  Top Layer w0.3: v1(111.938,42.037) 111.938,42.316 112.395,42.774 R10.1 ; v1@115.443,39.014 115.468,38.989 v1(115.468,38.633) 115.502,38.667 pad.2@115.502,40.978
  Bottom Layer w0.3: v1(111.938,42.037) 111.938,40.513 113.817,38.633 v1(115.468,38.633)
NetR11_1: pad.4 R11.1 | length 7.1
  Top Layer w0.3: R11.1 117.526,37.236 118.059,37.77 118.059,39.192 117.602,39.649 116.815,39.649 116.502,39.962 pad.4
NetR15_2: R15.2 U4.3 | length 3.3
  Top Layer w0.3: R15.2 149.554,51.767 U4.3
NetR18_1: R18.1 U5.2 X3.2 | length 6.7
  Top Layer w0.3: R18.1 140.62,44.8 U5.2 139.954,43.189 139.954,40.894 140.32,40.528 X3.2
NetR20_1: R20.1 U5.1 X3.3 | length 6.7
  Top Layer w0.3: X3.3 140.97,39.878 141.834,40.742 141.834,43.341 U5.1 141.32,45.054 R20.1
PG: pad.5 R9.2 U1.24 | length 30.2
  Top Layer w0.3: pad.5 118.625,40.978 118.796,41.148 R9.2 119.659,42.266 121.564,44.171 121.564,50.11 116.18,55.495 116.18,63.551 116.649,64.02 U1.24
POWER_SENSE: D1.1 R7.1 S1.1 U1.83 | length 43.4
  Top Layer w0.3: U1.83 128.158,77.1 128.158,78.014 134.599,84.455 144.247,84.455 148.831,89.04 151.701,89.04 v1(152.222,89.56) ; v1@152.273,89.586 153.054,88.805 R7.1 D1.1@154,85.983
  Bottom Layer w0.3: S1.1 149.835,91.948 v1(152.222,89.56)
POWER_SWITCH: Q1.1 R3.2 U1.84 | length 30.7
  Top Layer w0.3: U1.84 127.628,78.149 134.468,84.988 143.891,84.988 148.412,89.51 149.711,89.51 Q1.1 R3.2@150.581,91.958
QUAD_BK1_CLK: U1.47 U8.6 | length 10
  Top Layer w0.3: U8.6@123.584,56.032 U8.6 124.968,56.032 125.882,56.947 125.882,57.404 128.803,60.325 129.794,60.325 130.128,60.659 U1.47
QUAD_BK1_CS: U1.48 U8.1 | length 10.7
  Top Layer w0.3: U8.1@128.384,53.492 U8.1 130.48,53.492 130.658,53.671 130.658,61.94 U1.48
QUAD_BK1_IO0_SO: U1.36 U8.2 | length 9.7
  Top Layer w0.3: U1.36 124.628,59.166 v1(125.298,58.496) ; v1(126.771,54.762) U8.2@128.384,54.762
  Bottom Layer w0.3: v1(125.298,58.496) 125.298,56.236 v1(126.771,54.762)
QUAD_BK1_IO1_SI: U1.35 U8.5 | length 4.9
  Top Layer w0.3: U8.5@123.584,57.302 123.876,57.594 123.876,58.623 124.128,58.876 U1.35
QUAD_BK1_IO3_HOLD: U1.31 U8.7 | length 8.9
  Top Layer w0.3: U1.31 122.128,54.859 122.225,54.762 U8.7
RD: D2.22 U1.85 | length 43.7
  Top Layer w0.3: U1.85 127.128,78.462 134.747,86.081 v1(136.22,86.081)
  Bottom Layer w0.3: v1(136.22,86.081) 137.554,84.747 141.541,84.747 155.473,70.815 D2.22@159.918,70.815
RS: D2.20 U1.58 | length 45.8
  Top Layer w0.3: v1(129.591,66.777) 129.834,67.02 U1.58
  Bottom Layer w0.3: v1(129.591,66.777) 129.604,66.789 131.944,66.789 132.804,65.93 132.804,60.24 133.405,59.639 135.382,59.639 137.985,62.243 137.985,65.422 138.769,66.205 157.848,66.205 D2.20@159.918,68.275
RST: R17.2 S3.2 U1.14 | length 37
  Top Layer w0.3: S3.2 114.021,89.51 113.335,88.824 R17.2 112.263,84.562 114.783,82.042 v1(114.783,80.315) ; U1.14 120.693,69.02 v1(120.701,69.012)
  Bottom Layer w0.3: v1(114.783,80.315) 113.436,78.969 113.436,77.699 111.633,75.895 111.633,71.73 114.351,69.012 v1(120.701,69.012)
SCL: R6.1 U1.92 U2.3 U7.3 X1.4 | length 92.2
  Top Layer w0.3: v1(95.606,68.199) X1.4@98.323,68.199 ; R6.1 125.197,82.728 ; U1.92 123.628,80.804 125.197,82.372 125.197,82.728 ; v1(125.197,84.455) 125.197,82.728
  Bottom Layer w0.3: U7.3 79.146,82.956 79.146,72.898 80.151,71.894 U2.3 84.596,71.894 86.97,69.52 86.97,66.751 87.478,66.243 92.126,66.243 94.082,68.199 v1(95.606,68.199) ; X1.4 100.457,68.174 113.418,81.135 115.893,81.135 117.983,79.045 122.758,79.045 124.765,81.051 124.765,84.023 v1(125.197,84.455)
SDA: R5.1 U1.93 U2.2 U7.4 X1.3 | length 94.2
  Top Layer w0.3: v1(95.606,70.764) X1.3@98.298,70.764 ; R5.1 123.128,81.204 U1.93
  Bottom Layer w0.3: U7.4 88.007,90.529 87.376,91.161 84.785,91.161 77.673,84.049 77.673,72.492 79.541,70.624 U2.2 84.621,70.624 86.03,69.215 86.03,66.065 87.63,64.465 94.336,64.465 96.647,66.777 96.647,69.723 v1(95.606,70.764) ; X1.3 101.981,70.714 113.64,82.372 122.326,82.372 v1(123.114,81.585)
SWC: U1.76 X4.2 | length 12.1
  Top Layer w0.3: U1.76 131.628,78.593 132.232,79.197 136.389,79.197 138.701,76.886 X4.2
SWD: U1.72 X4.1 | length 7.9
  Top Layer w0.3: U1.72 140.644,74.02 X4.1
TP_CS: D2.29 U1.51 | length 54.6
  Top Layer w0.3: U1.51 133.178,62.63 136.398,59.411 v1(138.862,59.411) ; v1(154.254,60.02) 154.254,66.04 156.54,68.326 156.54,74.117 v1(157.328,74.905) v1@157.353,74.93 ; v1(156.489,82.169) 156.489,77.495 v1@157.429,76.556
  Bottom Layer w0.3: v1(138.862,59.411) 139.294,58.979 143.074,58.979 144.173,60.078 154.196,60.078 v1(154.254,60.02) ; v1(156.489,82.169) 156.566,82.245 161.188,82.245 D2.29@162.458,80.975 ; v1(157.328,74.905) v1(157.328,76.784)
TP_IRQ: D2.28 U1.87 | length 44.9
  Top Layer w0.3: U1.87 126.128,79.443 134.62,87.935 v1(134.62,88.824)
  Bottom Layer w0.3: v1(134.62,88.824) 135.585,88.824 138.709,85.7 146.71,85.7 151.656,80.754 151.656,80.712 152.307,80.061 158.293,80.061 D2.28@159.918,78.435
TP_SCK: D2.30 U1.52 U9.6 | length 46.4
  Top Layer w0.3: U1.52 134.38,64.02 135.026,63.373 v1(135.026,62.687) ; v1(136.093,67.005) 139.421,67.005 139.527,67.111 U9.6 ; v1(144.907,78.283) 149.911,78.283 152.476,80.848 v1(152.476,81.051)
  Bottom Layer w0.3: v1(135.026,62.687) 135.026,64.567 135.992,65.532 135.992,66.853 136.144,67.005 v1(136.093,67.005) 135.433,67.666 135.433,72.974 137.566,75.108 140.007,75.108 140.465,75.566 142.063,75.566 144.78,78.283 v1(144.907,78.283) ; v1(152.476,81.051) 159.842,81.051 D2.30@159.918,80.975
TP_SI: D2.31 U1.54 U9.5 | length 50.9
  Top Layer w0.3: U1.54 134.755,65.02 135.793,63.983 139.929,63.983 140.177,64.231 U9.5 140.835,68.156 v1(141.402,67.589) ; v1@153.594,75.667 153.594,71.196 152.705,70.307 152.705,68.631 v1(153.619,67.716) ; v1@153.695,77.648 153.822,77.775 v1(153.822,82.118)
  Bottom Layer w0.3: v1(141.402,67.589) v1@153.822,67.589 ; v1@153.721,75.692 v1(153.721,77.8) ; v1@153.848,82.169 156.489,84.811 161.163,84.811 D2.31@162.458,83.515
  other v1: 153.568,75.54
TP_SO: D2.32 U1.53 U9.2 | length 49.9
  Top Layer w0.3: U1.53 134.591,64.52 135.68,63.431 138.651,63.431 138.877,63.206 U9.2 138.877,61.402 139.421,60.858 v1(140.31,60.858) ; v1(155.626,63.449) 158.267,66.091 158.267,74.066 158.876,74.675 160.424,74.675 161.138,75.39 161.138,82.295 D2.32@159.918,83.515
  Bottom Layer w0.3: v1(140.31,60.858) 153.035,60.858 v1(155.626,63.449)
TS: pad.9 U1.25 | length 20.7
  Top Layer w0.3: v1(114.198,48.133) 114.198,47.955 115.502,46.652 pad.9 ; v1(117.246,56.236) 117.094,56.388 117.094,62.535 U1.25
  Bottom Layer w0.3: v1(114.198,48.133) 114.198,53.188 v1(117.246,56.236)
USART_RX: U1.69 X5.2 | length 15.3
  Top Layer w0.3: U1.69 135.125,72.52 136.042,71.603 v1(137.465,71.603)
  Bottom Layer w0.3: v1(137.465,71.603) 138.125,72.263 141.961,72.263 142.723,73.025 145.39,73.025 146.558,71.857 X5.2
USART_TX: U1.68 X5.1 | length 11.6
  Top Layer w0.3: U1.68 134.914,72.02 136.195,70.739 138.201,70.739 v1(138.76,71.298)
  Bottom Layer w0.3: v1(138.76,71.298) 138.862,71.399 X5.1
USB_N: R18.2 U1.70 | length 35.3
  Top Layer w0.3: U1.70 135.362,73.02 135.788,72.593 137.185,72.593
  Top Layer w0.381: 137.185,72.593 139.793,72.593 143.739,68.647 143.739,60.156 140.525,56.943 140.525,48.22 140.208,47.903 R18.2
USB_P: R20.2 R21.1 U1.71 | length 38.1
  Top Layer w0.3: U1.71 135.903,73.52 136.195,73.228 137.185,73.228
  Top Layer w0.381: 137.185,73.228 140.056,73.228 144.374,68.91 144.374,59.893 141.16,56.68 141.16,48.22 141.478,47.903 R20.2 R21.1@143.268,47.212
WR: D2.21 U1.86 | length 48.3
  Top Layer w0.3: U1.86 126.628,78.927 135.23,87.528 v1(135.23,87.3)
  Bottom Layer w0.3: v1(135.23,87.3) 136.322,87.3 138.404,85.217 141.935,85.217 155.042,72.111 161.163,72.111 D2.21@162.458,70.815
pads on no net: D2.1 D2.2 D2.24 U1.2 U1.3 U1.4 U1.5 U1.6 U1.7 U1.8 U1.9 U1.15 U1.16 U1.17 U1.18 U1.20 U1.21 U1.29 U1.30 U1.33 U1.34 U1.37 U1.63 U1.64 U1.65 U1.66 U1.67 U1.77 U1.78 U1.79 U1.91 U1.96 U1.97 U1.98 U2.1 U2.7 U2.8 U2.11 U2.14 U4.1 U4.7 U4.8 U8.3 U9.3 U9.7 X3.4 Z1.2 Z1.4
copper on no net:
  other v2: 138.776,89.448 145.776,89.448

## Polygon pours and split planes (outlines as drawn)
GND on Bottom Layer "Top Layer-No Net" (solid, remove dead copper, pour order 0): 71,36 71,96 164,96 164,36
GND on Top Layer "Top Layer-No Net" (solid, remove dead copper, pour order 2): 164,36 71,36 71,96 164,96

## Silkscreen, mask and mechanical layers (free items; w line width, h text height)
Top Overlay:
  circle w0.25: c114.327,40.978 r0.125
  lines w0.2: 114.452,42.228 114.452,43.828 ; 117.552,42.228 117.552,43.828
  text "RST" at 116.053,88.011 h1.5
  text "BOOT" at 101.6,87.986 h1.5
  text "GND" at 142.748,81.204 h1.5
  text "3.3" at 142.748,78.791 h1.5
  text "SWC" at 142.748,76.098 h1.5
  text "AD0" at 100.101,75.133 h1.5
  text "SWD" at 142.748,73.558 h1.5
  text "INT" at 100.101,72.415 h1.5
  text "SDA" at 100.101,69.85 h1.5
  text "SCL" at 100.101,67.335 h1.5
  text "TX" at 144.78,67.184 h1.5 r90
  text "RX" at 147.32,67.184 h1.5 r90
  text "3.3" at 149.784,65.934 h1.5 r90
  text "GND" at 152.476,65.684 h1.5 r90
  text "GND" at 100.101,64.872 h1.5
  text "3.3" at 100.101,62.281 h1.5
  text "+" at 156.337,49.327 h1.5
  text "-" at 156.261,46.711 h1.5
  text "Eltech / 2018" at 84.353,46.304 h1.5
Mechanical 4:
  the board outline again, w0.2
Mechanical 13:
  circle w0.1: c115.352,42.378 r0.5
  lines w0.1: 114.452,41.478 114.452,44.578 117.552,44.578 117.552,41.478 114.452,41.478
Mechanical 15:
  lines w0.05: 114.202,39.878 114.202,46.178 117.802,46.178 117.802,39.878 114.202,39.878
  lines w0.1: 115.502,43.028 116.502,43.028 ; 116.002,42.528 116.002,43.528

## Dimensions
74,93 to 161,93 on Mechanical 13
74,93 to 74,39 on Mechanical 13
70,35 to 165,97 on Mechanical 13